# Altium PCB LoRa_Node _V2.PcbDoc
Units mil, origin at the board's own origin, x right, y up, seen from the top; angles counter-clockwise.
Board outline 3555.03 x 2380.03 mil, 2 copper layers (Top Layer, Bottom Layer); 76 components, 60 nets, 297 pads, 79 vias.
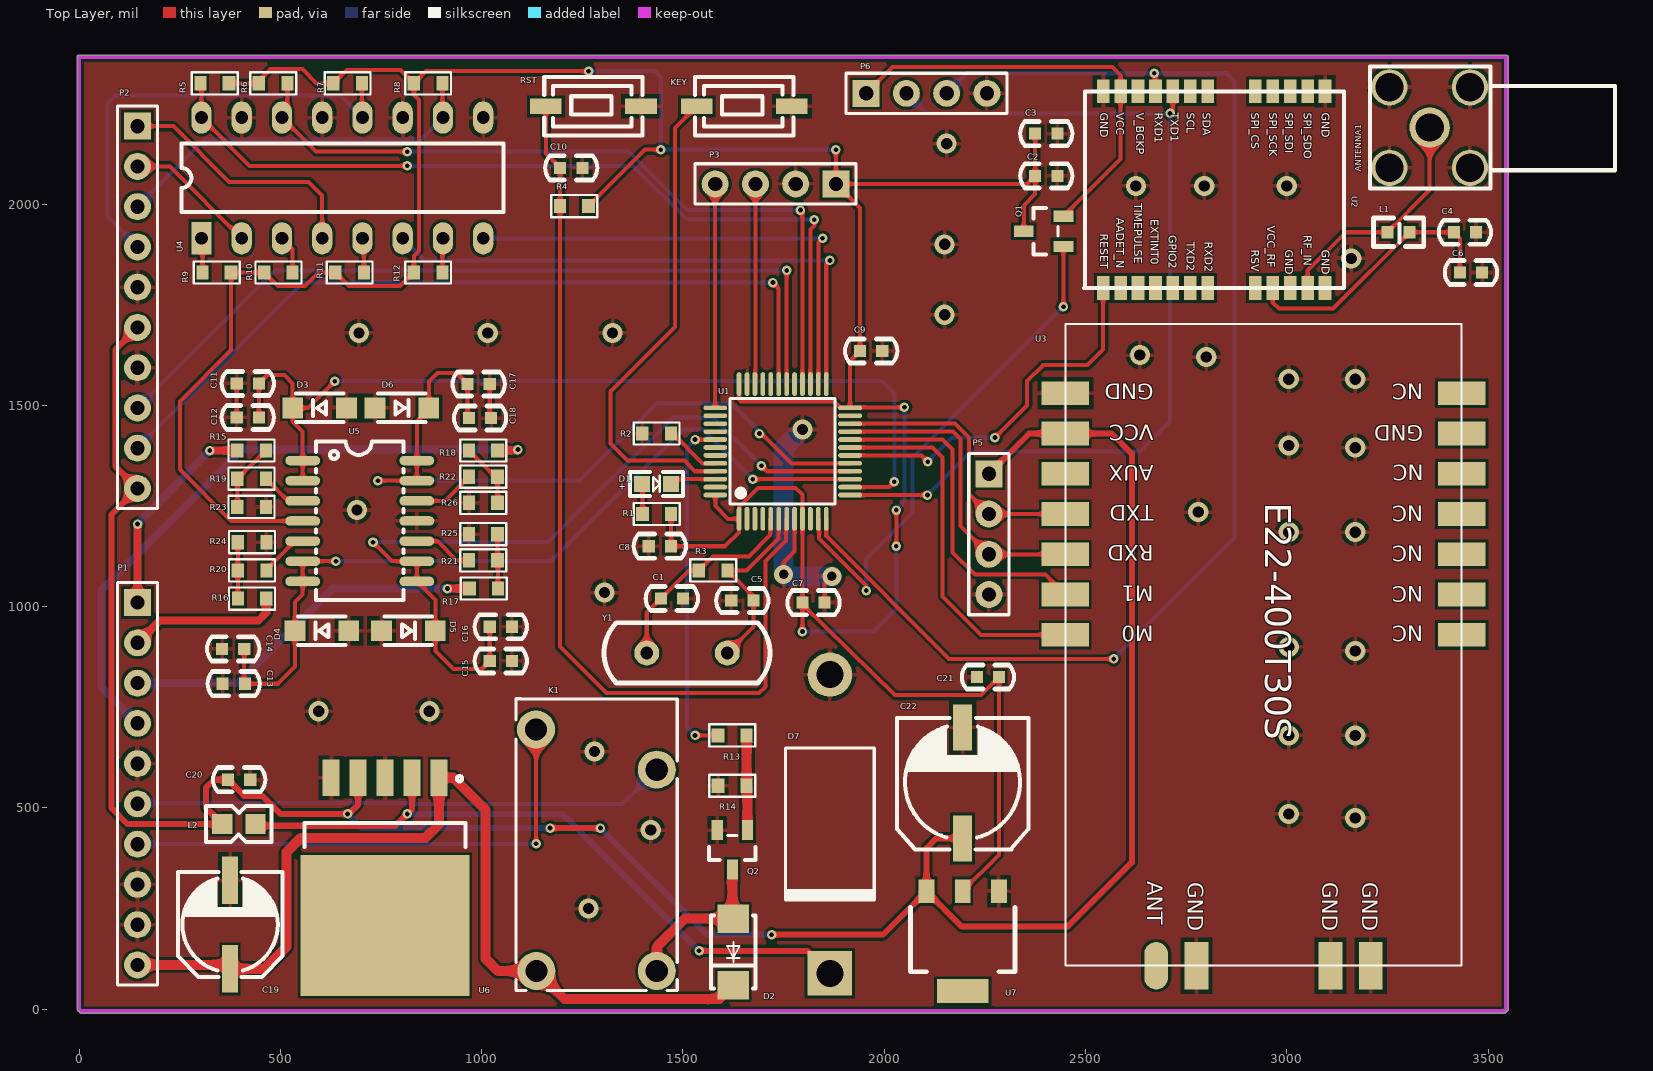
[diagram p0: Top Layer view]
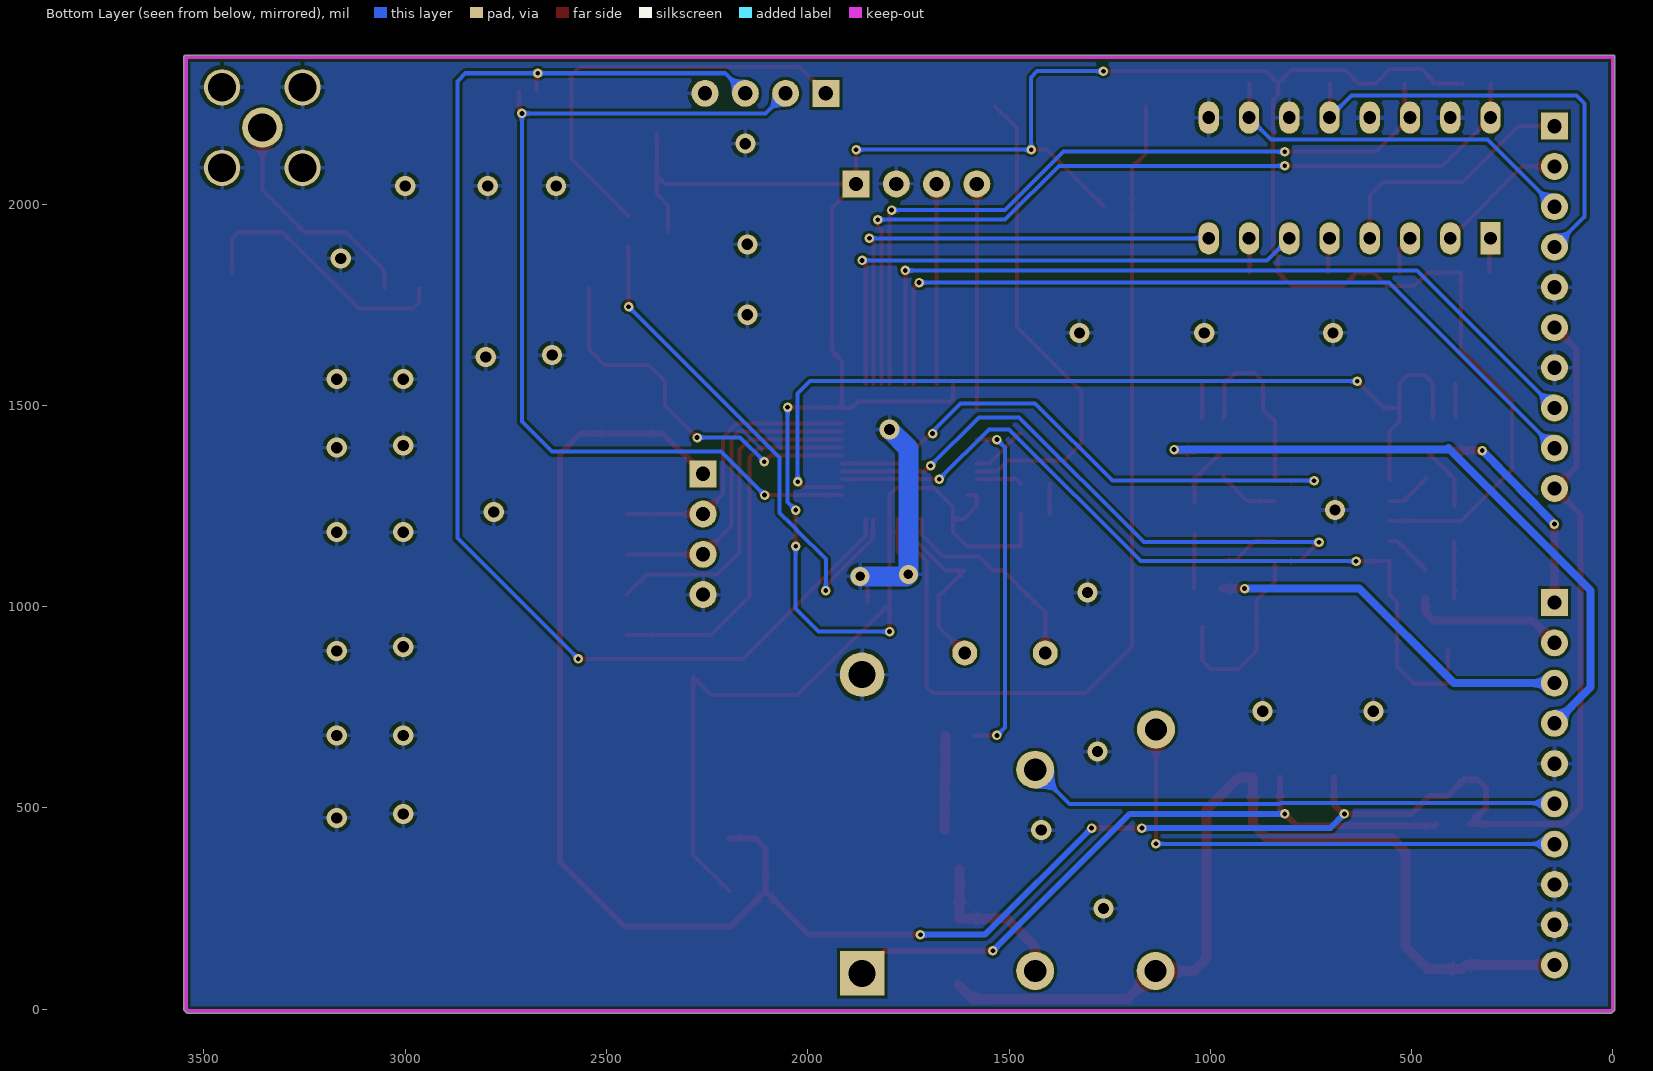
[diagram p1: Bottom Layer view, seen from below]

## Layer stack, top to bottom
Top Solder: solder mask 0.4, Solder Resist, Dk 3.5
Top Layer: signal copper 1.4
Dielectric 1: dielectric 12.6, FR-4, Dk 4.8
Bottom Layer: signal copper 1.4
Bottom Solder: solder mask 0.4, Solder Resist, Dk 3.5

## Board outline
-5.01,0 ccw(c0,0) -0.01,-5.01 ccw(c5,-5) 5,-10.01 3540,-10.01 ccw(c3540,-5) 3545.01,-5.01 ccw(c3545,0) 3550.01,0 3550.01,2365 ccw(c3545,2365) 3545,2370.01 0,2370.01 ccw(c0,2365) -5.01,2365

## Design rules (kind name [scope] priority, off if disabled: settings)
Clearance [All] p1: gap=7 ignorepadtopadclearanceinfootprint=TRUE
PolygonConnect [All] p1: connectstyle=Relief reliefconductorwidth=10 reliefentries=4 polygonreliefangle="90 Angle" airgapwidth=10
RoutingVias [All] p1: holewidth=11.81 width=23.62 viastyle="Through Hole" minholewidth=11.81 minwidth=23.62 maxholewidth=23.62 maxwidth=47.24
SilkToSolderMaskClearance [IsPad] p1: minsilkscreentomaskgap=0 clearancetoexposedcopper=TRUE
SolderMaskExpansion [All] p1: expansion=4
Width [All] p1: maxlimit=100 minlimit=7 preferedwidth=50 toplayer_prefwidth=30 minimp=50.000000 maximp=50.000000 favimp=50.000000
29 further rules are at their usual default settings.

## Components (designator, comment, footprint, x,y, rotation, side; value= is the part's Value field where it differs from the comment)
ANTENNA1 "Active antenna" SMA-W 3355,2190 r180 top
C1 "Cap8" 0603C 1450,1020 r0 top value=20pF
C2 "Cap15" 0603C 2380,2070 r0 top value=10uF
C3 "Cap16" 0603C 2380,2175 r0 top value=100nF
C4 "Cap17" 0603C 3420,1930 r0 top value=100nF
C5 "Cap9" 0603C 1670,1015 r180 top value=20pF
C6 "Cap18" 0603C 3435,1830 r0 top value=100nF
C7 "Cap11" 0603C 1801.89,1010 r0 top value=0.1uF
C8 "Cap12" 0603C 1465,1150 r180 top value=0.1uF
C9 "Cap13" 0603C 1945,1635 r0 top value=0.1uF
C10 "Cap10" 0603C 1200,2090 r0 top value=100nF
C11 "" 0603C 441.57,1554.45 r180 top value=10uF
C12 "Cap" 0603C 396.48,1470 r0 top value=0.01uF
C13 "" 0603C 406.57,808.43 r180 top value=10uF
C14 "Cap" 0603C 360.08,895 r0 top value=0.01uF
C15 "" 0603C 1025,865 r0 top value=10uF
C16 "Cap" 0603C 1070,950 r180 top value=0.01uF
C17 "" 0603C 970,1552.97 r0 top value=10uF
C18 "Cap" 0603C 1018.52,1468.52 r180 top value=0.01uF
C19 "100uF" 100uF-16V 504.9,10.95 r90 top
C20 "" 0603C 375,570 r0 top value=10uF
C21 "" 0603C 2280,825 r180 top value=10uF
C22 "1000uF" 1000uF-6.3V 2343.4,312.3 r90 top
D1 "LED1" D0603 1435,1305 r0 top
D2 "S-SZA12A" S-SZA12A 1680.12,-10.78 r90 top
D3 "SM2T3V3A" 3.3V稳压二极管(LMSZ5226BT1G) 454.84,1448.08 r0 top
D4 "SM2T3V3A" 3.3V稳压二极管(LMSZ5226BT1G) 460.55,894.57 r0 top
D5 "SM2T3V3A" 3.3V稳压二极管(LMSZ5226BT1G) 960.59,985.43 r180 top
D6 "SM2T3V3A" 3.3V稳压二极管(LMSZ5226BT1G) 944.45,1538.95 r180 top
D7 "1N5822" DO-201AD 1865,460 r270 top
K1 "32F/012-HS(551)" 32F/012-HS（551） 1549.72,-82.2 r90 top
KEY "SW-1" SW-1 1650,2245 r0 top (schematic designator SW1)
L1 "Inductor3" 0603L 3300,1930 r180 top value=68nH
L2 "Inductor" L0805 437.68,460 r180 top value=100uH
P1 "A-R" HDR2.54-LI-10P 145,560 r270 top
P2 "D-V" HDR2.54-LI-10P 145,1743.52 r270 top
P3 "Header 4" HDR2.54-LI-4P 1730,2050 r180 top
P5 "LoRa" HDR2.54-LI-4P 2260,1180 r270 top
P6 "GPS" HDR2.54-LI-4P 2105,2275 r0 top
Q1 "SI2302" FMMT493 2271.99,1869.92 r0 top
Q2 "FMMT493" FMMT493 1685.08,271.99 r90 top
R1 "Res11" 0603R 1435,1230 r180 top value=510
R2 "Res9" 0603R 1434.57,1430 r180 top value=10K
R3 "Res8" 0603R 1575,1090 r180 top value=1M
R4 "Res10" 0603R 1230,1995 r0 top value=100K
R5 "Res1" 0603R 337,2300 r0 top value=0
R6 "Res1" 0603R 482,2300 r180 top value=0
R7 "Res1" 0603R 667,2300 r180 top value=0
R8 "Res1" 0603R 867,2300 r180 top value=0
R9 "Res1" 0603R 342,1830 r0 top value=47
R10 "Res1" 0603R 495,1830 r180 top value=47
R11 "Res1" 0603R 672,1830 r180 top value=47
R12 "Res1" 0603R 867,1830 r180 top value=47
R13 "Res11" 0603R 1622.6,680 r180 top value=10K
R14 "Res11" 0603R 1622.6,555 r180 top value=2K
R15 "Res1" 0603R 428.46,1387.77 r180 top value=2K
R16 "Res1" 0603R 429.57,1020 r0 top value=1M
R17 "Res1" 0603R 1005,1045 r180 top value=1M
R18 "Res1" 0603R 1003.9,1387.77 r0 top value=1M
R19 "Res1" 0603R 428.46,1317.77 r180 top value=510
R20 "Res1" 0603R 429.57,1090 r180 top value=510
R21 "Res1" 0603R 1003.9,1115 r0 top value=510
R22 "Res1" 0603R 1003.9,1322.77 r0 top value=510
R23 "Res1" 0603R 428.46,1247.77 r180 top value=2K
R24 "Res1" 0603R 429.57,1160 r180 top value=1M
R25 "Res1" 0603R 1003.9,1180 r0 top value=150K
R26 "Res1" 0603R 1003.9,1257.77 r0 top value=82K
RST "SW-1" SW-1 1275,2245 r0 top (schematic designator SW2)
U1 "STM32F103C8T6" stm32l151c8t6 1545.82,1218.62 r0 top
U2 "UM220-III N" UM220-III 2722.05,1570 r270 top
U3 "E22-400T30S" PE32(915T30S) 2450,930 r270 top
U4 "TIL193" DIP16 303.81,1914.98 r90 top
U5 "LM324AN" LM324AN 502.17,1484.62 r270 top
U6 "LM2576SX-5.0/NOPB" LM2576SX-5.0/NOPB 495.16,615 r270 top
U7 "ASM1117-3.3V" SOT-223 2285,293.03 r180 top
Y1 "8MHz" XTAL 1615,885 r180 top

## Footprints (in the part's own frame and the unit in brackets; to place one, negate y for a bottom-side part, rotate by r counter-clockwise, add the part's x,y. Pads: shape width x height; smd on the part's side, far side on the other; paste and mask are expansions set on the pad)
3.3V稳压二极管(LMSZ5226BT1G) [mm]
  rect 1.3x1.3 smd: 1(1.92,1.154) 2(5.32,1.154)
  silkscreen extent 2.12,0.25 5.12,2.05
32F/012-HS（551） [mil]
  round 94.49 hole 55.12: 1(177.2,114.72) 2(177.2,413.92) 3(777.2,414.72) 4(677.2,114.72)
  silkscreen extent 129,64 854,465
100uF-16V [mm]
  rect 3x1 smd: 1(2.262,3.299) 2(7.862,3.299)
  silkscreen extent 1.77,0 8.36,6.6
0603C [mil]
  rect 30x30 smd: 1(-5,0) 2(50,0)
  silkscreen extent -42,-30 87,30
0603L [mil]
  rect 30x30 smd: 1(-5,0) 2(50,0)
  silkscreen extent -40,-35 85,35
0603R [mm]
  rect 0.762x0.9 smd: 1(-0.9,0)
  rect 0.8x0.9 smd: 2(0.9,0)
  silkscreen extent -1.45,-0.7 1.45,0.7, body extent -0.85,-0.4 0.85,0.4, height 0.56
1000uF-6.3V [mil]
  rect 114.2x47.2 smd: 1(112.1,148.8) 2(387.7,148.4)
  silkscreen extent 84,-15 411,312
D0603 [mm]
  rect 1x1 smd: 1(-0.94,0) 2(0.889,0)
  silkscreen extent -1.7,-0.76 1.65,0.76, body extent -1.03,-0.53 0.99,0.53, height 0.46
DIP16 [mil] "16脚300mil直插集成电路（蒜米工坊）"
  rect 80x50 hole 32: 1(0,0)
  oval 80x50 hole 32: 2(0,-100) 3(0,-200) 4(0,-300) 5(0,-400) 6(0,-500) 7(0,-600) 8(0,-700) 9(300,-700) 10(300,-600) 11(300,-500) 12(300,-400) 13(300,-300) 14(300,-200) 15(300,-100) 16(300,0)
  silkscreen extent 65,-750 235,50, body extent -8,-732 300,32, height 180
DO-201AD [mm] "Diode, Axial; Body 9.5 x 5.6 mm (LxDia. max), Lead Dia. 1.32 mm (max)"
  round 2.8 hole 1.7: 1(-9.42,0)
  rect 2.8x2.8 hole 1.7: 2(9.42,0)
  silkscreen extent -4.8,-2.8 4.9,2.8
FMMT493 [mm]
  rect 1.25x0.7 smd: 1(4.394,0.637) 2(4.394,2.537) 3(1.895,1.587)
  silkscreen extent 2.49,0.13 4.04,3.05
HDR2.54-LI-4P [mm] "排针，4脚"
  rect 1.7x1.7 hole 0.9: 1(-3.81,0)
  round 1.7 hole 0.9: 2(-1.27,0) 3(1.27,0) 4(3.81,0)
  silkscreen extent -5.08,-1.27 5.08,1.27, body extent -5.08,-1.27 5.08,1.27, height 8.5
HDR2.54-LI-10P [mm] "排针，10脚"
  rect 1.7x1.7 hole 0.9: 1(-11.43,0)
  round 1.7 hole 0.9: 2(-8.89,0) 3(-6.35,0) 4(-3.81,0) 5(-1.27,0) 6(1.27,0) 7(3.81,0) 8(6.35,0) 9(8.89,0) 10(11.43,0)
  silkscreen extent -12.7,-1.27 12.7,1.27, body extent -12.7,-1.27 12.7,1.27, height 8.5
L0805 [mil] "1/8W"
  rect 50x50 smd: 1(0,0) 2(82.3,0.2)
  silkscreen extent -40,-45 122,45, body extent 1,-24 80,25, height 22
LM324AN [mm]
  oval 0.6x2.198 smd: 1(3.095,1.353) 2(4.365,1.353) 3(5.635,1.353) 4(6.905,1.353) 5(8.175,1.353) 6(9.445,1.353) 7(10.715,1.353) 8(10.715,8.553) 9(9.445,8.553) 10(8.175,8.553) 11(6.905,8.553) 12(5.635,8.553) 13(4.365,8.553) 14(3.095,8.553)
  silkscreen extent 1.9,2.2 11.91,7.7
LM2576SX-5.0/NOPB [mil]
  rect 90x42.1 smd: 1(40,398.84) 2(40,331.84) 3(40,264.84) 4(40,197.84) 5(40,130.84)
  rect 350x419.68 smd: 6(407.54,264.84)
  silkscreen extent 36,65 212,465
PE32(915T30S) [mm] "40.5mm*25mm*3.80mm-S"
  rect 1.5x3 smd: 1(0,0) 2(-2.54,0) 3(-5.08,0) 4(-7.62,0) 5(-10.16,0) 6(-12.7,0) 7(-15.24,0) 8(-15.24,25) 9(-12.7,25) 10(-10.16,25) 11(-7.62,25) 12(-5.08,25) 13(-2.54,25) 14(0,25)
  rect 3x1.5 smd: 15(20.88,19.27) 16(20.88,16.73) 17(20.88,8.27)
  oval 3x1.5 smd: 18(20.88,5.73)
  silkscreen extent -19.62,0 20.88,25
S-SZA12A [mm]
  rect 1.8x2 smd: 1(1.789,1.4) 2(5.989,1.4)
  silkscreen extent 1.59,0 6.19,2.8
SMA-W [mil]
  round 100 hole 70: 1(0,0)
  round 90 hole 70: 2(-100,100) 2(-100,-100) 2(100,100) 2(100,-100)
  silkscreen extent -460,-152 148,151, body extent -460,-140 135,136, height 108
SOT-223 [mil]
  rect 39x59 smd: 1(0,0) 3(180,0)
  rect 38.98x59.05 smd: 2(90,0)
  rect 129.13x59 smd: 4(90,248.03)
  silkscreen extent -40,40 220,200
stm32l151c8t6 [mm]
  oval 0.3x1.5 smd: 1(2.377,-0.012) 2(2.877,-0.012) 3(3.377,-0.012) 4(3.877,-0.012) 5(4.377,-0.012) 6(4.877,-0.012) 7(5.377,-0.012) 8(5.877,-0.012) 9(6.377,-0.012) 10(6.877,-0.012) 11(7.377,-0.012) 12(7.877,-0.012) 25(7.877,8.488) 26(7.377,8.488) 27(6.877,8.488) 28(6.377,8.488) 29(5.877,8.488) 30(5.377,8.488) 31(4.877,8.488) 32(4.377,8.488) 33(3.877,8.488) 34(3.377,8.488) 35(2.877,8.488) 36(2.377,8.488)
  oval 1.5x0.3 smd: 13(9.377,1.488) 14(9.377,1.988) 15(9.377,2.488) 16(9.377,2.988) 17(9.377,3.488) 18(9.377,3.988) 19(9.377,4.488) 20(9.377,4.988) 21(9.377,5.488) 22(9.377,5.988) 23(9.377,6.488) 24(9.377,6.988) 37(0.877,6.988) 38(0.877,6.488) 39(0.877,5.988) 40(0.877,5.488) 41(0.877,4.988) 42(0.877,4.488) 43(0.877,3.988) 44(0.877,3.488) 45(0.877,2.988) 46(0.877,2.488) 47(0.877,1.988) 48(0.877,1.488)
  silkscreen extent 1.8,0.92 8.43,7.58
SW-1 [mm]
  rect 2x1 smd: 1(-2.937,-0.055) 2(3.063,-0.055)
  silkscreen extent -3.04,-1.91 3.16,1.8
UM220-III [mm]
  rect 1.5x0.8 smd: 1(-5.634,-4.527) 2(-5.634,-3.427) 3(-5.634,-2.327) 4(-5.634,-1.227) 5(-5.634,-0.127) 6(-5.634,0.973) 7(-5.634,2.073) 8(-5.634,5.073) 9(-5.634,6.173) 10(-5.634,7.273) 11(-5.634,8.373) 12(-5.634,9.473) 13(-18.034,9.473) 14(-18.034,8.373) 15(-18.034,7.273) 16(-18.034,6.173) 17(-18.034,5.073) 18(-18.034,2.073) 19(-18.034,0.973) 20(-18.034,-0.127) 21(-18.034,-1.227) 22(-18.034,-2.327) 23(-18.034,-3.427) 24(-18.034,-4.527)
  silkscreen extent -18.03,-5.73 -5.63,10.67
XTAL [mil]
  round 62 hole 32: 1(5,0) 2(205,0)
  silkscreen extent -101,-75 311,75

## Part data
C1 C2 C3 C4 C5 C6 C7 C8 C9 C10: library part Cap, "Capacitor", LatestRevisionDate=17-Jul-2002, LatestRevisionNote="Re-released for DXP Platform.", PackageDescription="Radial Cap, Thru-Hole; 2 Leads; 0.3 in Pin Spacing", PackageReference=RAD-0.3, Published=8-Jun-2000, Publisher="Altium Limited"
C11 C13 C15 C17 C20 C21: library part "Cap Pol1", "Polarized Capacitor (Radial)", LatestRevisionDate=17-Jul-2002, LatestRevisionNote="Re-released for DXP Platform.", PackageDescription="Polarized Capacitor (Radial); 2 Leads", PackageReference=RB7.6-15, Published=8-Jun-2000, Publisher="Altium Limited"
C12 C14 C16 C18: "无极性电容", LatestRevisionDate=17-Jul-2002, LatestRevisionNote="Re-released for DXP Platform.", PackageReference=RAD-0.3, Published=8-Jun-2000, Publisher="Altium Limited"
C19 C22: library part "Cap Pol2", "Polarized Capacitor (Axial)", LatestRevisionDate=17-Jul-2002, LatestRevisionNote="Re-released for DXP Platform.", PackageDescription="Polarized Capacitor; 2 Leads", PackageReference=POLAR0.8, Published=8-Jun-2000, Publisher="Altium Limited"
D1: "Typical RED GaAs LED", LatestRevisionDate=08-Jul-2005, LatestRevisionNote="Mech Layer 1 removed.", PackageDescription="LED; 2 Leads", PackageReference=LED-1, Published=8-Jun-2000, Publisher="Altium Limited"
D2: library part "D Zener", "Zener Diode", LatestRevisionDate=17-Jul-2002, LatestRevisionNote="Re-released for DXP Platform.", PackageDescription="Diode, Thru-Hole; 2 Leads; 0.7 in Pin Spacing", PackageReference=DIODE-0.7, Published=8-Jun-2000, Publisher="Altium Limited"
D3 D4 D5 D6: library part "Diode 10TQ035", "Schottky Rectifier", ComponentLink1Description="Manufacturer Link", ComponentLink1URL=http://www.irf.com/, ComponentLink2Description=Datasheet, ComponentLink2URL=http://www.irf.com/product-info/datasheets/data/10tq.pdf, DatasheetVersion=PD-2.057B, LatestRevisionDate=17-Jul-2002, LatestRevisionNote="Re-released for DXP Platform.", Note="Terminal 2 is the TAB and is electrically connected to the cathode", PackageDescription="TO, Thru-Hole, Vertical, Heatsink Mounted; 3 In-Line Leads (1 Absent); Pitch 2.54 mm", PackageReference=TO-220AC, PackageVersion=Feb-1998, Published=8-Jun-2000, Publisher="Altium Limited"
D7: library part "Diode 1N5408", "3 Amp Medium Power Silicon Rectifier Diode", ComponentLink1Description="Manufacturer Link", ComponentLink1URL=http://www.irf.com/, DatasheetVersion=Aug-1984, LatestRevisionDate=17-Jul-2002, LatestRevisionNote="Re-released for DXP Platform.", PackageDescription="Diode, Axial; Body 9.5 x 5.3 mm (LxDia. max), Lead Dia. 1.32 mm (max)", PackageReference=DO-201AD, Published=8-Jun-2000, Publisher="Altium Limited"
L1: library part Inductor, "Inductor", Code_IEC=1005, Code_JEITA=0402, LatestRevisionDate=29-May-2009, LatestRevisionNote="IPC-7351 Footprint Added.", PackageDescription="Chip Inductor", PackageReference=0402-A, Published=8-Jun-2000, Publisher="Altium Limited"
L2: "电感", Code_IEC=1005, Code_JEITA=0402, LatestRevisionDate=17-Jul-2002, LatestRevisionNote="Re-released for DXP Platform.", PackageReference=0402-A, Published=8-Jun-2000, Publisher="Altium Limited"
P1 P2: library part MHDR1X10, "Header, 10-Pin", LatestRevisionDate=17-Jul-2002, LatestRevisionNote="Re-released for DXP Platform.", Publisher="Altium Limited"
P3: "接插件", LatestRevisionDate=17-Jul-2002, LatestRevisionNote="Re-released for DXP Platform.", Publisher="Altium Limited"
P5 P6: library part "Header 4", "Header, 4-Pin", LatestRevisionDate=17-Jul-2002, LatestRevisionNote="Re-released for DXP Platform.", Publisher="Altium Limited"
Q1: library part MOSFET-N, "N-Channel MOSFET", LatestRevisionDate=17-Jul-2002, LatestRevisionNote="Re-released for DXP Platform.", PackageDescription="TO, Flat Index; 3 In-Line, Axial Leads; Body Dia. 4.6mm; Lead Dia. 0.5 mm (max)", PackageReference=E3, PackageVersion=1995/1996, Published=8-Jun-2000, Publisher="Altium Limited"
Q2: library part S8050, "NPN三极管", PackageDocument=Sep-1998, Code_JEDEC=TO-92A, ComponentLink1Description="Manufacturer Link", ComponentLink1URL=http://www.fairchildsemi.com/, ComponentLink2Description=Datasheet, ComponentLink2URL=http://www.fairchildsemi.com/ds/2N%2F2N3904.pdf, DatasheetDocument=1997, LatestRevisionDate=15-Jan-2003, LatestRevisionNote="PCB Footprint 'BCY-W3/D4.7' replaced", PackageReference=TO-92A, Published=8-Jun-2000, Publisher="Altium Limited"
R1 R2 R3 R4 R13 R14: library part Res2, "Resistor", LatestRevisionDate=17-Jul-2002, LatestRevisionNote="Re-released for DXP Platform.", PackageDescription="Axial Device, Thru-Hole; 2 Leads; 0.4 in Pin Spacing", PackageReference=AXIAL-0.4, Published=8-Jun-2000, Publisher="Altium Limited"
R5 R6 R7 R8 R9 R10 R11 R12 R15 R16 R17 R18 R19 R20 R21 R22 R23 R24 R25 R26: "贴片电阻", LatestRevisionDate=17-Jul-2002, LatestRevisionNote="Re-released for DXP Platform.", PackageReference=AXIAL-0.4, Published=8-Jun-2000, Publisher="Altium Limited"
U4: library part TIL93
U7: library part ASM1117, "3.3V稳压芯片"
Y1: library part XTAL, "Crystal Oscillator", LatestRevisionDate=17-Jul-2002, LatestRevisionNote="Re-released for DXP Platform.", PackageDescription="Crystal, Thru-Hole; 2 Leads; Body 3.1 x 8.2 mm (Dia.xH)", PackageReference=R38, Published=8-Jun-2000, Publisher="Altium Limited"

## Via types
v1: diameter 23.62, hole 11.81, Top Layer to Bottom Layer, 44 vias
v2: diameter 50, hole 28, Top Layer to Bottom Layer, 33 vias
v3: diameter 47.24, hole 23.62, Top Layer to Bottom Layer, 2 vias

## Nets (pads, with @x,y where several pads share a name; then routed paths per layer and width w, separated by ;. In a path a pad name is that pad's centre, name@x,y a point inside that pad or via, vN(x,y) a via of type N, cw(c..) or ccw(c..) an arc to the next point about the centre after c; other vN are vias at no path point)
+3.3V: C2.1 C3.1 C7.1 C8.1 C9.1 C21.1 P3.1 Q1.3 R1.1 R4.2 R5.2 R6.2 R7.2 R8.2 R9.2 R10.2 R11.2 R12.2 U1.1 U1.9 U1.24 U1.36 U1.48 U5.4 U7.2 | length 8695.4
  Top Layer w10: R5.2 R6.2 446.57,2306.57 475,2335 555,2335 590,2300 R7.2 665,2333.43 798.13,2333.43 R8.2 ; U5.4 377.6,1212.77 250,1340.37 250,1510 377.43,1637.43 R9.2 R10.2 493.49,1796.08 561.08,1796.08 595,1830 R11.2 670.49,1796.08 797.65,1796.08 R12.2 831.57,1871.17 843.81,1883.42 843.81,2258.8 831.57,2271.04 R8.2 ; R4.2 1405.43,2135 v1(1445,2135) ; v1(1265.43,2330) 861.57,2330 R8.2 ; R1.1 1470.43,1150.43 C8.1 1605,1150 1639.41,1184.41 U1.1 ; U1.48@1605,1277.2 U1.48 1580.35,1249.65 1611.85,1218.15 U1.1 ; U1.36 1639.41,1515 1644.41,1510 1875,1510 1891.26,1493.74 U1.24 ; v1(1796.89,938.11) C7.1@1796.89,1005 ; v1(1880,2135) P3.1 ; v1(2030,1150) v1(2030,1240) ; v1(2050,1495) 1916.26,1495 U1.24 ; U7.2 2285,383.03 C21.1 2240,780 2026.89,780 C7.1@1796.89,1005 ; Q1.3 2346.6,1996.6 2375,2025 C2.1 ; C3.1 C2.1 ; U1.1 1639.41,1247.41 1686.99,1295 1780,1295 1796.89,1278.11 U1.9 C7.1 C7.1@1796.89,1005 ; P3.1 2355,2050 C2.1 ; P3.1 1940,1990 C9.1 1915,1610 U1.24
  Bottom Layer w10: v1(1265.43,2330) 1430,2330 1445,2315 v1(1445,2135) v1(1880,2135) ; v1(1796.89,938.11) 1973.11,938.11 2030,995 v1(2030,1150) ; v1(2030,1240) 2050,1260 v1(2050,1495)
+5V: C20.1 C22.1 L2.2 P2.6 P2.10 P5.1 U3.6 U6.4 U7.3 | length 6021.7
  Top Layer w15: P2.6 90,1638.52 90,1348.52 P2.10 80,1228.52 80,500 120.2,459.8 L2.2 315,500.18 315,550 335,570 C20.1 410,530 455,530 500,485 v1(666.81,485) 670,485 693,508 U6.4 ; v1(1170,450) v1(1295,450) ; v1(1720,185) 1996.97,185 U7.3 ; C22.1 2129.4,424.4 2105,400 U7.3 ; P5.1 2360,1430 U3.6 2565,1430 2615,1380 2615,365 2455,205 2193.03,205 U7.3
  Bottom Layer w15: v1(666.81,485) 701.81,450 v1(1170,450) ; v1(1295,450) 1560,185 v1(1720,185)
+12V: C19.1 D2.1 K1.2 P1.10 U6.1 | length 2345.4
  Top Layer w25: P1.10 365,110 C19.1 460,100 515,155 515,390 550.69,425.69 860.69,425.69 894,459 U6.1 930,575 1010,495 1010,125 1040,95 K1.2 1205.8,25 1590.35,25 D2.1
ADC1: C11.1 C12.2 D3.1 U1.14 U5.1 U5.2 | length 2307.4
  Top Layer w10: C12.2 446.57,1470.08 C11.1 467.12,1575 510,1575 530.43,1554.57 D3.1 ; U5.2 U5.1 555.43,1434.57 530.43,1459.57 D3.1 ; v1(635,1560) 568.52,1493.52 D3.1 ; U1.14 2011.89,1296.89 v1(2025,1310)
  Bottom Layer w10: v1(635,1560) 1995,1560 2025,1530 v1(2025,1310)
ADC2: C13.1 C14.2 D4.1 U1.15 U5.6 U5.7 | length 2045.3
  Top Layer w10: C14.2 410.08,809.92 C13.1 493.43,808.43 536.14,851.14 D4.1 536.14,1011.14 555.43,1030.43 U5.7 U5.6 v1(637.77,1112.77) ; v1(1673.43,1316.57) U1.15
  Bottom Layer w10: v1(637.77,1112.77) 1172.77,1112.77 1500,1440 1550,1440 v1(1673.43,1316.57)
ADC3: C15.1 C16.2 D5.1 U1.16 U5.8 U5.9 | length 1986.1
  Top Layer w10: v1(730,1160) 777.23,1112.77 U5.9 U5.8 885,1016.67 D5.1 885,890 930,845 1000,845 C15.1 C16.2 ; v1(1695,1350) 1708.74,1336.26 U1.16
  Bottom Layer w10: v1(730,1160) 1165,1160 1475,1470 1575,1470 v1(1695,1350)
ADC4: C17.1 C18.2 D6.1 U1.17 U5.13 U5.14 | length 1874.2
  Top Layer w10: v1(742.23,1312.77) U5.13 U5.14 838.9,1460 868.86,1489.96 D6.1 868.86,1558.86 890,1580 937.97,1580 C17.1 965,1472.03 C18.2 ; v1(1690,1430) 1695,1430 1769.06,1355.94 U1.17
  Bottom Layer w10: v1(742.23,1312.77) 1242.77,1312.77 1435,1505 1620,1505 1690,1435 v1(1690,1430)
ADCIN1: P1.1 R15.2 | length 519.8
  Top Layer w20: P1.1 v1(145,1205) ; v1(324.34,1387.77) R15.2
  Bottom Layer w20: v1(145,1205) v1(324.34,1387.77)
ADCIN2: P1.2 R16.2 | length 386.1
  Top Layer w20: P1.2 200,965 445,965 465,985 R16.2
ADCIN3: P1.3 R17.2 | length 921.9
  Top Layer w20: v1(915,1045) R17.2
  Bottom Layer w20: P1.3 395,810 630,1045 v1(915,1045)
ADCIN4: P1.4 R18.2 | length 1601.8
  Top Layer w20: R18.2 1087.77,1387.77 v1(1090,1390)
  Bottom Layer w20: P1.4 55,800 55,1040 408.52,1393.52 412.03,1390 v1(1090,1390)
DI1: P2.1 U4.4 | length 636.4
  Top Layer w10: P2.1 233.92,2193.52 372.43,2055 570,2055 603.81,2021.19 U4.4
DI1_IO: R6.1 U1.28 U4.14 | length 1908.3
  Top Layer w10: R6.1 517.43,2228.61 U4.14 588.8,2130 v1(815,2130) ; v1(1791.89,1985) 1796.89,1980 U1.28
  Bottom Layer w10: v1(815,2130) 1365,2130 1510,1985 v1(1791.89,1985)
DI2: P2.2 U4.2 | length 332.8
  Top Layer w10: P2.2 225.28,2093.52 U4.2
DI2_IO: R5.1 U1.27 U4.16 | length 2125.8
  Top Layer w10: R5.1 303.81,2297.76 U4.16 423.8,2095 v1(815,2095) ; U1.27 1816.58,1936.58 1826.19,1946.19 v1(1826.19,1961.19)
  Bottom Layer w10: v1(815,2095) 1375.96,2095 1509.77,1961.19 v1(1826.19,1961.19)
DO1: P2.3 R8.1 U4.10 | length 936.1
  Top Layer w10: R8.1 902.43,2216.36 U4.10
  Bottom Layer w10: P2.3 311.47,2159.98 820.38,2159.98 848.83,2160 U4.10
DO1_IO: U1.26 U4.8 | length 1209.6
  Top Layer w10: U1.26 1836.26,1904.37 v1(1846.87,1914.98)
  Bottom Layer w10: U4.8 v1(1846.87,1914.98)
DO2: P2.4 R7.1 U4.12 | length 1138
  Top Layer w10: R7.1 702.43,2216.36 U4.12
  Bottom Layer w10: P2.4 70,1968.52 70,2250 89.98,2269.98 648.81,2269.98 U4.12
DO2_IO: U1.25 U4.6 | length 1394.9
  Top Layer w10: U1.25 1855.94,1850.94 v1(1865,1860)
  Bottom Layer w10: U4.6 858.8,1860 v1(1865,1860)
GND: ANTENNA1.2 C1.2 C2.2 C3.2 C4.2 C5.2 C6.2 C7.2 C8.2 C9.2 C10.2 C11.2 C12.1 C13.2 C14.1 C15.2 C16.1 C17.2 C18.1 C19.2 C20.2 C21.2 C22.2 D3.2 D4.2 D5.2 D6.2 D7.1 KEY.2 P1.5 P1.8 P1.9 P2.5 P2.7 P3.2 P5.4 P6.4 Q2.2 R2.2 R14.2 R23.1 R24.1 R25.1 R26.1 RST.2 U1.8 U1.23 U1.35 U1.47 U2.10 U2.12 U2.13 U2.24 U3.7 U3.15 U3.16 U3.17 U4.9 U4.11 U4.13 U4.15 U5.11 U6.3 U6.5 U7.1 | length 893.8
  Top Layer w10: C12.1 391.48,1554.37 C11.2 ; C17.2 1020,1472.03 C18.1 ; v3(1750,1080) 1750,1109.41 1777.2,1136.61 U1.8 ; C7.2 1851.89,1056.89 v3(1870,1075)
  Bottom Layer w10: v3(1750,1080) v3@1755,1075
  Bottom Layer w50: v3(1750,1080) 1750,1393.11 v2(1796.89,1440) ; v3@1755,1075 v3(1870,1075)
  other v2: 1265.43,250 1420,445 3170,475 3005,485 1280,640 3005,680 3170,680 595,740 870,740 3170,890 3005,900 1305,1035 3005,1185 3170,1185 2780,1235 690,1240 3170,1395 3005,1400 3005,1565 3170,1565 2800,1620 2635,1625 695,1680 1015,1680 1325,1680 2150,1725 3160,1865 2150,1900 2625,2045 2795,2045 3000,2045 2155,2150
GPS_EN: Q1.1 U1.11 | length 1285.6
  Top Layer w10: U1.11 1838.04,1216.37 1838.04,1168.87 1955,1051.9 v1(1955,1040) ; v1(2445,1745) Q1.1
  Bottom Layer w10: v1(1955,1040) 1955,1118.15 2026.19,1189.34 2026.19,1189.86 2040.14,1203.81 2040.66,1203.81 2070,1233.15 2070,1370 v1(2445,1745)
GPS_RST: U1.18 U2.1 | length 938.9
  Top Layer w10: U1.18 2092.14,1375.63 v1(2107.77,1360) ; v1(2275,1420) 2355,1500 2355,1560 2395,1600 2505,1600 2543.82,1638.82 U2.1
  Bottom Layer w10: v1(2107.77,1360) 2167.77,1420 v1(2275,1420)
GPS_RXD: P6.3 U1.12 U2.21 | length 3233.1
  Top Layer w10: U1.12 1855.94,1175 2160.94,870 v1(2570,870) ; v1(2670.59,2325) 2673.74,2321.85 U2.21
  Bottom Layer w10: P6.3 2205,2325 v1(2670.59,2325) 2850,2325 2870,2305 2870,1170 v1(2570,870)
GPS_TXD: P6.2 U1.13 U2.20 | length 2369.3
  Top Layer w10: U1.13 v1(2107.2,1277.2) ; v1(2710,2225) 2717.05,2232.05 U2.20
  Bottom Layer w10: P6.2 2105,2225 v1(2710,2225) 2710,1460 2635,1385 2215,1385 v1(2107.2,1277.2)
GPS_VCC: P6.1 Q1.2 U2.23 | length 1076.4
  Top Layer w10: P6.1 2020,2340 2567.13,2340 2587.13,2320 U2.23 2587.13,2111.93 Q1.2
KEY: KEY.1 U1.45 | length 1215.5
  Top Layer w10: KEY.1 1480,2188.47 1480,1695 1320,1535 1320,1405 1362.23,1362.77 1503.49,1362.77 1530,1336.26 U1.45
LED: D1.2 U1.46 | length 115.1
  Top Layer w10: D1.2 1481.57,1316.57 U1.46
LoRa_RXD: P5.3 U1.21 U3.3 | length 787.7
  Top Layer w10: U1.21 2171.27,1434.69 2190,1415.96 2190,1200 P5.3 U3.3
LoRa_TXD: P5.2 U1.22 U3.4 | length 709.9
  Top Layer w10: U1.22 2175.63,1454.37 2210,1420 2210,1280 P5.2 U3.4
M0: U1.19 U3.1 | length 929.8
  Top Layer w10: U1.19 2119.68,1395.32 2145,1370 2145,1025 2240,930 U3.1
M1: U1.20 U3.2 | length 843.8
  Top Layer w10: U1.20 2145,1415 2170,1390 2170,1135 2225,1080 2400,1080 U3.2
NetANTENNA1_1: ANTENNA1.1 L1.2 U2.11 | length 584.3
  Top Layer w10: U2.11 3051.69,1835 3146.69,1930 L1.2 3355,2035 ANTENNA1.1
NetC1_1: C1.1 R3.2 U1.5 Y1.2 | length 527.6
  Top Layer w10: Y1.2 1410,985 C1.1 1515,1090 R3.2 1574.57,1125 1664.04,1125 1716.37,1177.32 1716.37,1216.37 U1.5
NetC4_1: C4.1 C6.1 L1.1 U2.9 | length 677.9
  Top Layer w10: U2.9 2965.08,1755 2980.08,1740 3115,1740 L1.1 C4.1 3430,1915 C6.1
NetC5_1: C5.1 R3.1 U1.6 Y1.1 | length 467.5
  Top Layer w10: Y1.1 1675,950 C5.1 1675,1025.43 R3.1 1658.03,1090 1737.83,1169.8 U1.6
NetD1_1: D1.1 R1.2 | length 75.6
  Top Layer w10: D1.1 1399.57,1303.43 R1.2
NetD2_2: D2.2 K1.1 Q2.3 | length 431.6
  Top Layer w25: K1.1@1465,95 K1.1 1435,155 1505,225 D2.2 1622.6,227.4 Q2.3
NetD7_2: D7.2 L2.1 U6.2 | length 1700.2
  Top Layer w15: L2.1 441.99,455.69 785.69,455.69 v1(815,485) 827,497 U6.2 ; v1(1540,145) 1809.13,145 D7.2
  Bottom Layer w15: v1(815,485) 1200,485 v1(1540,145)
NetQ2_1: Q2.1 R13.1 R14.1 | length 235.8
  Top Layer w25: R13.1 R14.1 1660,553.03 Q2.1
NetR2_1: R2.1 U1.44 | length 141
  Top Layer w10: R2.1 1475,1430 1549.06,1355.94 U1.44
NetR9_1: R9.1 U4.1 | length 86.1
  Top Layer w10: U4.1 306.57,1912.23 R9.1
NetR10_1: R10.1 U4.3 | length 96
  Top Layer w10: U4.3 530.43,1888.36 R10.1
NetR11_1: R11.1 U4.5 | length 86.5
  Top Layer w10: U4.5 707.43,1911.36 R11.1
NetR12_1: R12.1 U4.7 | length 85.6
  Top Layer w10: R12.1 902.43,1913.61 U4.7
NetR15_1: R15.1 R19.2 R23.2 | length 169.9
  Top Layer w10: R23.2 R19.2 393.9,1317.77 R15.1
NetR16_1: R16.1 R20.2 R24.2 | length 140
  Top Layer w10: R16.1 R20.2 R24.2
NetR17_1: R17.1 R21.2 R25.2 | length 135.5
  Top Layer w10: R25.2 R21.2 1040.43,1113.9 R17.1
NetR18_1: R18.1 R22.2 R26.2 | length 162.8
  Top Layer w10: R18.1 1033.46,1322.77 R22.2 R26.2
NetR19_1: R19.1 U5.3 | length 114.3
  Top Layer w10: R19.1 518.9,1262.77 U5.3
NetR20_1: R20.1 U5.5 | length 121.6
  Top Layer w10: R20.1 465,1091.72 536.05,1162.77 U5.5
NetR21_1: R21.1 U5.10 | length 149.4
  Top Layer w10: U5.10 890,1162.77 937.77,1115 R21.1
NetR22_1: R22.1 U5.12 | length 154.4
  Top Layer w10: U5.12 908.46,1262.77 R22.1
NRST: C10.1 R4.1 RST.1 U1.7 | length 2361.2
  Top Layer w10: RST.1 1159.37,2125.63 C10.1 1195,1995.43 R4.1 1194.57,900.43 1310,785 1689.09,785 1705,800.91 1705,1112.93 1755.74,1163.66 1755.74,1216.37 U1.7
Relay_IN: K1.4 P1.6 | length 1326.7
  Bottom Layer w10: P1.6 146.81,511.81 826.11,511.81 827.92,510 1350,510 K1.4
Relay_IO: R13.2 U1.41 | length 859.1
  Top Layer w10: v1(1530,680) R13.2 ; v1(1530,1415) U1.41
  Bottom Layer w10: v1(1530,680) 1510,700 1510,1395 v1(1530,1415)
Relay_OUT: K1.3 P1.7 | length 1274.5
  Top Layer w10: v1(1135,410.8) K1.3
  Bottom Layer w10: P1.7 145.8,410.8 v1(1135,410.8)
RXD1: P2.9 U1.31 | length 2007.1
  Top Layer w10: v1(1723.52,1805) 1737.83,1790.68 U1.31
  Bottom Layer w10: P2.9 556.48,1805 v1(1723.52,1805)
SWCLK: P3.4 U1.37 | length 556.4
  Top Layer w10: P3.4 1580,1494.09 U1.37
SWDIO: P3.3 U1.34 | length 497.7
  Top Layer w10: U1.34 1680,1554.02 P3.3
TXD1: P2.8 U1.30 | length 2036.2
  Top Layer w10: U1.30 v1(1757.52,1835)
  Bottom Layer w10: P2.8 486.48,1835 v1(1757.52,1835)
pads on no net: U1.2 U1.3 U1.4 U1.10 U1.29 U1.32 U1.33 U1.38 U1.39 U1.40 U1.42 U1.43 U2.2 U2.3 U2.4 U2.5 U2.6 U2.7 U2.8 U2.14 U2.15 U2.16 U2.17 U2.18 U2.19 U2.22 U3.5 U3.8 U3.9 U3.10 U3.11 U3.12 U3.13 U3.14 U3.18 U6.6 U7.4

## Polygon pours and split planes (outlines as drawn)
GND on Top Layer "GND_L01_P022" (solid, remove dead copper, pour order 22): -340,2515 -340,-75 -385,-120 3915,-120 3915,2600 4000,2685
GND on Bottom Layer "GND_L02_P024" (solid, remove dead copper, pour order 24): -395,2515 -405,2505 -405,-295 4415,-295 4560,-150 4160,250 4160,2710

## Keep-outs
Keep-Out Layer:
  lines w10: 0,0 5,-5 3540,-5 3545,0 3545,2365 0,2365 0,0

## Text inside footprints (layer, text, board x,y; h text height)
D1: Top Overlay "+" at 1340,1290 h15
U2: Top Overlay "GND" at 2536.57,2226.81 h19.68 r270; Top Overlay "VCC" at 2576.57,2226.81 h19.68 r270; Top Overlay "V_BCKP" at 2626.57,2226.81 h19.68 r270; Top Overlay "RXD1" at 2671.57,2226.81 h19.68 r270; Top Overlay "TXD1" at 2711.57,2226.81 h19.68 r270; Top Overlay "SCL" at 2751.57,2226.81 h19.68 r270; Top Overlay "SDA" at 2791.57,2226.81 h19.68 r270; Top Overlay "SPI_CS" at 2911.57,2226.81 h19.68 r270; Top Overlay "SPI_SCK" at 2956.57,2226.81 h19.68 r270; Top Overlay "SPI_SDI" at 2996.57,2226.81 h19.68 r270; Top Overlay "SPI_SDO" at 3041.57,2226.81 h19.68 r270; Top Overlay "GND" at 3086.57,2226.81 h19.68 r270; Top Overlay "GND" at 3086.57,1886.81 h19.68 r270; Top Overlay "RF_IN" at 3041.57,1922.89 h19.68 r270; Top Overlay "GND" at 2996.57,1886.81 h19.68 r270; Top Overlay "VCC_RF" at 2951.57,1945.85 h19.68 r270; Top Overlay "RSV" at 2911.57,1886.81 h19.68 r270; Top Overlay "RXD2" at 2796.57,1906.49 h19.68 r270; Top Overlay "TXD2" at 2751.57,1906.49 h19.68 r270; Top Overlay "GPIO2" at 2706.57,1922.89 h19.68 r270; Top Overlay "EXTINT0" at 2661.57,1962.25 h19.68 r270; Top Overlay "TIMEPULSE" at 2621.57,2001.6 h19.68 r270; Top Overlay "AADET_N" at 2576.57,1965.53 h19.68 r270; Top Overlay "RESET" at 2536.57,1926.17 h19.68 r270
U3: Top Overlay "NC" at 3340,1352.44 h39.37 r180; Top Overlay "GND" at 3187.4,315.75 h39.37 r270; Top Overlay "GND" at 3088.58,315.75 h39.37 r270; Top Overlay "NC" at 3339.45,951.93 h39.37 r180; Top Overlay "NC" at 3339.45,1050.75 h39.37 r180; Top Overlay "NC" at 3339.45,1151.14 h39.37 r180; Top Overlay "NC" at 3339.45,1250.75 h39.37 r180; Top Overlay "GND" at 3339.45,1451.14 h39.37 r180; Top Overlay "NC" at 3339.45,1553.11 h39.37 r180; Top Overlay "GND" at 2669.49,1553.9 h39.37 r180; Top Overlay "VCC" at 2669.49,1451.93 h39.37 r180; Top Overlay "AUX" at 2669.49,1351.54 h39.37 r180; Top Overlay "TXD" at 2669.49,1251.54 h39.37 r180; Top Overlay "RXD" at 2669.49,1151.93 h39.37 r180; Top Overlay "M1" at 2669.49,1051.54 h39.37 r180; Top Overlay "M0" at 2669.49,952.72 h39.37 r180; Top Overlay "ANT" at 2653.54,317.62 h39.37 r270; Top Overlay "GND" at 2753.94,315.75 h39.37 r270